# Altium PCB EBC2.PcbDoc (part 2 of 2)
Units mil, origin at the board's own origin, x right, y up, seen from the top; angles counter-clockwise.
Board outline 4019.72 x 2051.49 mil, 2 copper layers (Top Layer, Bottom Layer), stack 12.8 mil thick; 138 components, 112 nets, 469 pads, 88 vias.
Unrouted connection lines stored in the file: 2.
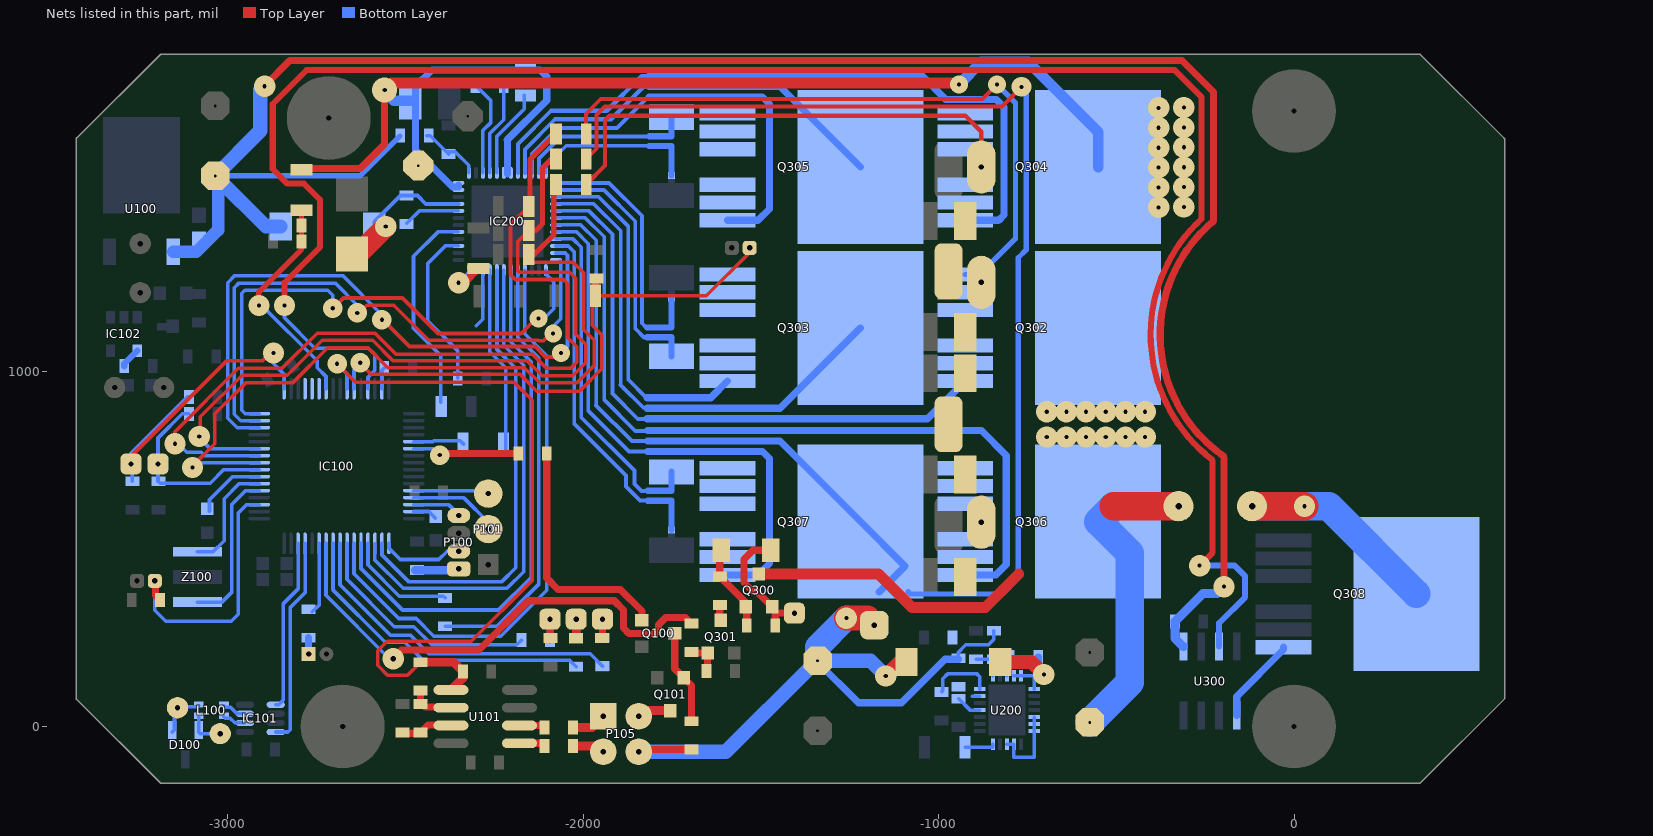
[diagram p2: the nets of this part, all layers, seen from the top]

## Via types
v1: diameter 60, hole 11.81, Top Layer to Bottom Layer, 60 vias
v2: diameter 60, hole 15, Top Layer to Bottom Layer, 13 vias
v3: diameter 55, hole 11.81, Top Layer to Bottom Layer, 8 vias
v4: diameter 50, hole 11.81, Top Layer to Bottom Layer, 6 vias
v5: diameter 70, hole 11.81, Top Layer to Bottom Layer, 1 vias

## Nets (pads, with @x,y where several pads share a name; then routed paths per layer and width w, separated by ;. In a path a pad name is that pad's centre, name@x,y a point inside that pad or via, vN(x,y) a via of type N, cw(c..) or ccw(c..) an arc to the next point about the centre after c; other vN are vias at no path point) (continued)
AN_IN: C122.1 IC100.23 R121.2 R122.1 | length 634.9
  Top Layer w15: v1(-2913,1185) -2913,1223 -2793,1343 C122.1@-2793,1365 R122.1@-2793,1410 R121.2@-2793,1452.83
  Bottom Layer w10: v1(-2913,1185) -2905,1185 -2749,1029 -2749,1010 -2724.13,985.13 IC100.23@-2724.13,950.54
BRK: IC100.29 U300.3 | length 5611.8
  Top Layer w17: v1@-2841,1179 v1(-2841,1185) -2841,1249 -2741,1349 -2741,1483 -2786,1528 -2833,1528 -2874.02,1569.02 -2874.02,1751.97 -2778.48,1847.5 -926.22,1847.5 -925.72,1847 -853.28,1847 -852.78,1847.5 -819.22,1847.5 -818.72,1847 -336,1847 -260,1771 -260,1428.49 ; v1(-265.75,452.76) -229,489.5 -229,748 ; -260.45,1428.49 ccw(c39.37,1102.36) -230.92,751.38
  Bottom Layer w10: v1(-2841,1185) -2841,1150 -2756,1065 -2605,1065 -2587.5,1047.5 -2587.5,1001.5 -2606.02,982.98 IC100.29@-2606.02,950.54
  Bottom Layer w17: v1(-265.75,452.76) -167.32,452.76 -137.8,423.23 -137.8,364.17 -211.22,290.75 U300.3@-211.22,224.95
BTN: C106.1 IC100.3 P103.1 | length 753
  Top Layer w20: P103.1@-3206,410 -3204,408 -3204,369 C106.1@-3191,356
  Bottom Layer w10: P103.1@-3206,410 -3206,327 -3175,296 -2991,296 -2971,316 -2971,601 -2947.25,624.75 IC100.3@-2912.13,624.75
BUCK: C111.1 C113.1 C213.1 L201.2 R204.2 U100.1 U300.1 | length 5899.4
  Top Layer w20: v1(-2897,1802) -2897,1803 -2826,1874 -315,1874 -227,1786 -227,1423 ; -228.86,1420.34 ccw(c39.37,1102.36) -199.24,761.59 ; v1(-196.85,393.7) -196.85,756
  Bottom Layer w15: C213.1@-3036,1549.57 -2628.43,1549.57 R204.2@-2516,1662
  Bottom Layer w25: U300.1@-311.22,224.95 -335.28,249.01 C113.1@-335.28,295.28 -256.54,374.02 -216.54,374.02 v1(-196.85,393.7)
  Bottom Layer w35: U100.1@-3154.24,1335.74 -3089.26,1335.74 -3028,1397 C213.1@-3028,1541.57
  Bottom Layer w40: v1(-2897,1802) -2898,1802 -2909,1791 -2909,1676.57 C213.1@-3036,1549.57 -3028,1541.57 -2893.43,1407 L201.2@-2851.89,1407
CAN_H: D100.1 J100.1 L100.2 | length 137
  Bottom Layer w10: D100.1@-3157.4,-15.66 -3150.59,-8.85 -3150.59,44.41 J100.1@-3142,53 -3139.13,55.87 -3085.31,55.87 L100.2@-3082.43,58.75
CAN_L: D100.2 J101.1 L100.1 | length 105.4
  Bottom Layer w10: L100.1@-3082.43,27.25 -3082.52,27.17 -3082.52,-15.58 -3082.6,-15.66 -3078.26,-20 J101.1@-3022,-20
CAN_RX: IC100.61 IC101.4 | length 585.2
  Bottom Layer w10: IC101.4@-2865.69,-15.39 -2831.39,-15.39 -2825,-9 -2825,335 -2783.19,376.81 IC100.61@-2783.19,515.5
CAN_TX: IC100.62 IC101.1 | length 484.9
  Bottom Layer w10: IC101.1@-2865.69,61.39 -2857.53,61.39 -2845,73.91 -2845,345 -2802.87,387.13 IC100.62@-2802.87,515.5
CUR_GLBL: C119.1 IC100.26 R114.1 U101.5 | length 2091.3
  Top Layer w10: v3(-2693,1021) -2641,969 -2195,969 -2144,918 -2144,411 -2315,240 -2552,240 -2579,213 -2579,172 -2551,144 -2495,144 R114.1@-2458,181
  Top Layer w25: R114.1@-2458,181 -2365,181 C119.1@-2339,155 -2339,136.46 U101.5@-2372.46,103
  Bottom Layer w10: v3@-2684,1021 v3(-2693,1021) -2665.08,993.08 IC100.26@-2665.08,950.54
DM: IC100.44 P101.3 | length 215.1
  Bottom Layer w10: IC100.44@-2477.09,664.12 -2281.03,664.12 P101.3@-2267.59,650.68
DP: IC100.45 P101.2 | length 266.8
  Bottom Layer w10: IC100.45@-2477.09,644.43 -2337.43,644.43 -2266.59,573.59 P101.2@-2266.59,546.68
EN_GATE: IC200.33 R103.1 | length 533.3
  Bottom Layer w10: IC200.33@-2263.14,1284.57 -2263.14,1055.14 -2218,1010 R103.1@-2218,770
FAULT: IC100.54 IC200.28 | length 1680.1
  Bottom Layer w10: IC100.54@-2645.39,515.5 -2645.39,430.39 -2519,304 -2470,304 -2420.5,254.5 -2232.5,254.5 -2103,384 -2103,1043.34 -2164.72,1105.05 IC200.28@-2164.72,1284.57
HALL1: IC100.55 R108.1 | length 674.1
  Bottom Layer w10: IC100.55@-2665.08,515.5 -2665.08,414.08 -2532,281 -2477,281 -2426,230 -2187,230 R108.1@-2174,243
HALL2: IC100.56 R107.1 | length 950.3
  Bottom Layer w10: IC100.56@-2684.76,515.5 -2684.76,398.76 -2543.5,257.5 -2487.5,257.5 -2435,205 -1981,205 R107.1@-1946,170
HALL3: IC100.57 R106.1 | length 905.2
  Bottom Layer w10: IC100.57@-2704.45,515.5 -2704.45,384.45 -2557.12,237.12 -2502.12,237.12 -2451,186 -2038,186 R106.1@-2020,168
LED_1: IC100.59 R105.1 | length 200.8
  Bottom Layer w10: R105.1@-2762.92,322.61 -2743.82,341.72 IC100.59@-2743.82,515.5
NetC103_1: C103.1 IC100.47 | length 68.1
  Bottom Layer w10: IC100.47@-2477.09,605.06 -2434.98,605.06 C103.1@-2416.59,586.68
NetC104_1: C104.1 IC100.31 | length 59.8
  Bottom Layer w10: IC100.31@-2566.65,950.54 -2566.65,1002.35 C104.1@-2561,1008
NetC110_1: C110.1 IC102.4 | length 58.7
  Bottom Layer w18: C110.1@-3292,1014 -3292,1020.84 IC102.4@-3255.31,1057.54
NetC202_1: C202.1 IC200.3 | length 268.8
  Bottom Layer w10: C202.1@-2300,1801 -2260,1761 -2260,1700 -2282.83,1677.17 IC200.3@-2282.83,1558.2
NetC202_2: C202.2 IC200.4 | length 259
  Bottom Layer w10: IC200.4@-2263.14,1558.2 -2263.14,1668.86 -2224,1708 C202.2@-2224,1801
NetC203_2: C203.2 U200.16 | length 72.7
  Bottom Layer w10: C203.2@-943.89,78.37 -911.89,46.37 U200.16@-884.46,46.37
NetC204_1: C204.1 IC200.5 | length 249.9
  Bottom Layer w10: IC200.5@-2243.46,1558.2 -2243.46,1660.54 -2166,1738 C204.1@-2166,1776
NetC205_2: C205.2 IC200.36 | length 120
  Top Layer w20: v1(-2351,1249) -2334.91,1249 C205.2@-2295,1288.91
  Bottom Layer w10: v1(-2351,1249) -2322.2,1277.8 IC200.36@-2322.2,1284.57
NetC206_1: C206.1 U200.22 | length 63.7
  Bottom Layer w10: U200.22@-807.89,142.63 -807.89,195.37 C206.1@-799.89,195.37 C206.1@-796.89,195.37
NetC206_2: C206.2 L200.1 U200.1 U200.23 U200.24 | length 287.2
  Top Layer w40: L200.1@-826.89,181.37 -738.89,181.37 v1(-703.89,146.37)
  Bottom Layer w10: U200.23@-788.2,142.63 U200.24@-768.52,142.63 -731.32,142.63 U200.1@-731.32,105.43
  Bottom Layer w20: C206.2@-719.89,195.37 -719.89,162.37 v1(-703.89,146.37)
NetC207_1: C207.1 R201.1 U200.20 | length 94.4
  Bottom Layer w10: C207.1@-894.89,189.37 -847.26,189.37 U200.20@-847.26,142.63
NetC208_1: C208.1 U200.12 | length 87.3
  Bottom Layer w10: C208.1@-925.8,-58.63 -847.26,-58.63 U200.12@-847.26,-49.89
NetC210_1: C210.1 IC200.44 | length 159.7
  Bottom Layer w10: C210.1@-2496.95,1416.05 -2462.09,1450.91 IC200.44@-2351.72,1450.91
NetC210_2: C210.2 D200.2 IC200.45 L201.1 | length 429.5
  Top Layer w60: D200.2@-2662,1327 -2636,1327 v1(-2556,1407)
  Bottom Layer w11: L201.1@-2588.11,1407 -2588.11,1420.89 -2514.9,1494.1 C210.2@-2497,1494.1 -2467.1,1494.1 -2443.6,1470.6 IC200.45@-2351.72,1470.6
NetC212_1: C212.1 J200.1 L200.2 P105.4 R123.1 R201.2 R202.2 | length 1940.4
  Top Layer w20: P105.4@-1844,-71 -1838,-65 R123.1@-1696,-65
  Top Layer w40: v1(-1148.89,142) -1109.52,181.37 L200.2@-1090.67,181.37
  Top Layer w70: v1(-1259.84,305.12) -1200.79,305.12 J200.1@-1181.1,285.43
  Bottom Layer w10: C212.1@-1355.89,169.85 C212.1@-1340.89,184.85 ; R202.2@-944.89,189.37 -944.89,208.48 -923.37,230 -859.89,230 -844.89,245 R201.2@-844.89,269.37
  Bottom Layer w20: C212.1@-1340.89,184.85 -1340.89,181.89 -1226,67 -1104.26,67 -981.89,189.37 R202.2@-944.89,189.37
  Bottom Layer w40: P105.4@-1844,-71 -1599,-71 -1358.15,169.85 C212.1@-1355.89,169.85 ; C212.1@-1340.89,184.85 -1191.74,184.85 v1(-1148.89,142)
  Bottom Layer w70: C212.1@-1340.89,184.85 -1340.89,224.07 v1(-1259.84,305.12)
NetD300_1: D300.1 Q300.1 R308.1 R310.2 | length 244.2
  Top Layer w20: D300.1@-1611.88,496 -1616,491.88 R310.2@-1616,422 -1540,346 R308.1@-1540,285
NetD300_2: D300.2 J300.1 Q300.2 R308.2 | length 357.1
  Top Layer w20: Q300.2@-1468.6,336.74 -1513.86,382 -1525,382 -1548,405 -1548,471 -1523,496 D300.2@-1472.12,496 D300.2@-1468.6,492.48 ; R308.2@-1460,285 -1460,322 -1457,319 J300.1@-1406,319
NetIC100_5: IC100.5 Z100.1 | length 448.6
  Bottom Layer w10: Z100.1@-3086,350.27 -3016.73,350.27 -2990,377 -2990,624 -2949.88,664.12 IC100.5@-2912.13,664.12
NetIC100_6: IC100.6 Z100.3 | length 322.4
  Bottom Layer w10: Z100.3@-3086,492 -3042,492 -3011,523 -3011,641 -2968.2,683.8 IC100.6@-2912.13,683.8
NetIC100_9: IC100.9 R302.1 R303.1 | length 2239.8
  Top Layer w10: v1(-3100,729) -3100,733 -3037,796 -3037,880 -2949,968 -2817,968 -2719,1066 -2606,1066 -2550,1010 -2166,1010 -2123,967 -2018,967 -1969,1016 -1969,1087 -1999,1117 -1999,1277 -2029,1307 -2147,1307 R303.1@-2154,1314
  Top Layer w15: R303.1@-2154,1314 R303.1@-2154,1328 ; R303.1@-2139,1328 -2083,1384 R302.1@-2083,1508
  Bottom Layer w10: v1(-3100,729) -3100,732 -3089.14,742.86 IC100.9@-2912.13,742.86
NetIC100_10: IC100.10 R300.1 R301.1 | length 2430.5
  Top Layer w10: v1(-3149.27,795.79) -3149.27,829.73 -2971,1008 -2848,1008 -2749,1107 -2586.28,1107 -2527.28,1048 -2143,1048 -2102.76,1007.76 -2036.24,1007.76 -2019,1025 -2019,1069 -2044,1094 -2044,1246 -2056,1258 -2192,1258 -2205,1271 -2205,1413 R301.1@-2154,1464
  Top Layer w15: R301.1@-2154,1464 -2150,1468 -2150,1596 R300.1@-2078,1668
  Bottom Layer w10: v1(-3149.27,795.79) -3139.79,795.79 -3116,772 -3075,772 -3065.54,762.54 IC100.10@-2912.13,762.54
NetIC100_11: IC100.11 R304.1 R305.1 | length 2280.9
  Top Layer w10: v1@-3081.73,809.35 -3081.38,809 -3077.69,812.69 -3077.69,871.31 -2960,989 -2833,989 -2735,1087 -2593,1087 -2536,1030 -2159,1030 -2116,987 -2030,987 -1993,1024 -1993,1076 -2021,1104 -2021,1261 -2038,1278 -2180,1278 -2184,1282 -2184,1366 R305.1@-2154,1396
  Top Layer w15: R305.1@-2154,1396 -2134,1396 -2115,1415 -2115,1572 -2090,1597 R304.1@-2077,1597
  Bottom Layer w10: v1(-3081,816) -3081.5,816 -3083,814.5 -3050.72,782.23 IC100.11@-2912.13,782.23
NetIC100_14: IC100.14 IC200.23 | length 1850.2
  Top Layer w11: v3@-2567,1147 -2489,1069 -2135,1069 -2106,1040 -2074,1040 v4(-2063,1051) v4@-2062,1052
  Bottom Layer w10: IC100.14@-2912.13,841.28 -2974.28,841.28 -3001,868 -3001,1249 -2982,1268 -2676,1268 v3@-2567,1159 ; IC200.23@-2077.12,1332.8 -2076.92,1332.61 -2051.61,1332.61 -2045,1326
  Bottom Layer w11: v3@-2567,1147 v3@-2567,1159 ; v4@-2062,1052 -2045,1069 -2045,1326
  other v3: -2567,1145
NetIC100_15: IC100.15 IC200.24 | length 1645.2
  Top Layer w10: v3(-2636,1164) -2632,1164 -2610,1186 -2534,1186 -2435.5,1087.5 -2127.34,1087.5 -2125.84,1086 -2112,1086 v4@-2102,1096
  Bottom Layer w10: IC100.15@-2912.13,860.97 -2963.97,860.97 -2982,879 -2982,1235 -2969,1248 -2698,1248 -2636,1186 v3(-2636,1164) ; v4@-2099,1099 v4@-2082,1099 ; v4@-2094.5,1116.5 -2063.5,1147.5 -2063.5,1308.5 IC200.24@-2065.12,1310.12
  other v4: -2085,1106
NetIC100_16: IC100.16 IC200.25 | length 1510.8
  Top Layer w10: v3(-2705,1177) -2704,1177 -2675,1206 -2509,1206 -2409,1106 -2175,1106 v4@-2131,1150
  Bottom Layer w10: IC100.16@-2912.13,880.65 -2951.65,880.65 -2961,890 -2961,1219 -2952,1228 -2719,1228 -2705,1214 v3(-2705,1177) ; v4@-2131,1150 -2119,1150 -2114,1145 -2083,1176 -2083,1251 -2105.66,1273.66 IC200.25@-2105.66,1284.57
  other v4: -2126,1148
NetIC100_37: IC100.37 R103.2 | length 145
  Bottom Layer w10: IC100.37@-2477.09,801.91 -2423.36,801.91 -2420.78,804.5 -2346.59,804.5 R103.2@-2337.09,795
NetIC101_6: IC101.6 L100.4 | length 66.3
  Bottom Layer w10: L100.4@-3011.57,27.25 -3007.71,23.39 -2994.39,23.39 -2981.21,10.21 IC101.6@-2952.31,10.21
NetIC101_7: IC101.7 L100.3 | length 68.8
  Bottom Layer w10: L100.3@-3011.57,58.75 -3007.71,54.89 -2993.89,54.89 -2974.8,35.8 IC101.7@-2952.31,35.8
NetIC200_1: IC200.1 R204.1 R205.2 | length 183.4
  Bottom Layer w10: R204.1@-2440,1663 R204.1@-2435,1663 -2431,1663 R205.2@-2386,1618 ; R205.2@-2379,1611 R205.2@-2386,1618 ; IC200.1@-2322.2,1558.2 -2322.2,1579.2 -2361,1618 R205.2@-2386,1618
NetIC200_12: IC200.12 NT300.1 | length 480.4
  Bottom Layer w10: IC200.12@-2105.66,1558.2 -2105.66,1576.34 -2048,1634 -1813,1634
  Bottom Layer w18: -1814.96,1633.86 -1751.97,1633.86 NT300.1@-1751.97,1551.18
NetIC200_13: IC200.13 NT301.1 | length 752.5
  Bottom Layer w10: IC200.13@-2077.12,1529.65 -1927.65,1529.65 -1835,1437 -1835,1135
  Bottom Layer w11: -1835,1135 -1822,1122
  Bottom Layer w18: -1820.87,1122.99 -1751.97,1122.99 NT301.1@-1751.97,1205.67
NetIC200_22: IC200.22 NT302.1 | length 1005.2
  Bottom Layer w10: IC200.22@-2077.12,1352.49 -2076.92,1352.29 -2042.29,1352.29 -2025,1335 -2025,851
  Bottom Layer w11: -2025,851 -1880,706 -1880,675 -1841,636 -1820,636
  Bottom Layer w18: -1818.9,635.83 -1751.97,635.83 NT302.1@-1751.97,553.15
NetIC200_29: IC200.29 R104.1 | length 1221.5
  Bottom Layer w10: R104.1@-2389,282 -2244,282 -2125,401 -2125,1036 -2184.4,1095.4 IC200.29@-2184.4,1284.57
NetIC200_34: IC200.34 | length 164.1
  Bottom Layer w10: -2301,1128 -2282.83,1146.17 IC200.34@-2282.83,1284.57
NetIC200_39: IC200.39 R100.1 | length 464.6
  Bottom Layer w10: R100.1@-2354,980 -2354,1058 -2438,1142 -2438,1303 -2388.51,1352.49 IC200.39@-2351.72,1352.49
NetIC200_41: IC200.41 R101.1 | length 596.7
  Bottom Layer w10: R101.1@-2401,913 -2401,1044 -2478,1121 -2478,1323 -2409.14,1391.86 IC200.41@-2351.72,1391.86
NetJ102_1: J102.1 R106.2 R109.1 | length 107
  Top Layer w25: R109.1@-2020,249 J102.1@-2020,302
  Bottom Layer w25: R106.2@-2020,248 J102.1@-2020,302
NetJ103_1: J103.1 R107.2 R110.1 | length 105.4
  Top Layer w20: R110.1@-1947,249 -1946,250 J103.1@-1946,302
  Bottom Layer w20: R107.2@-1946,250 J103.1@-1946,302
NetJ104_1: J104.1 R108.2 R111.1 | length 112.4
  Top Layer w20: J104.1@-2094,302 -2094,250 R111.1@-2093,249
  Bottom Layer w20: R108.2@-2094,243 J104.1@-2094,302
NetJ305_1: J305.1 Q308.7 | length 712.5
  Top Layer w80: J305.1@-118.11,620.08 v1(29.53,620.08)
  Bottom Layer w80: J305.1@-118.11,620.08 v1(29.53,620.08) 97.64,620.08 Q308.7@344.49,373.23
NETLABEL23: IC100.20
NETLABEL24: IC100.21
NETLABEL25: IC100.22
NetP100_1: P100.1 R102.1 | length 123.7
  Bottom Layer w25: R102.1@-2472.59,439.68 -2354.59,439.68 P100.1@-2350.59,443.68
NetP102_1: P102.1 R105.2 | length 46.4
  Bottom Layer w20: R105.2@-2774,250 -2774,205 P102.1@-2773,204
NetP105_1: P105.1 R119.1 | length 98.3
  Top Layer w25: R119.1@-2029,-3 -1976,-3 P105.1@-1944,29
NetP105_2: P105.2 Q101.3 | length 95.5
  Top Layer w10: P105.2@-1844,29 P105.2@-1828.26,44.74
  Top Layer w25: P105.2@-1828.26,44.74 Q101.3@-1755,44.74
NetP105_3: P105.3 R118.1 | length 91.6
  Top Layer w25: R118.1@-2029,-55 -1960,-55 P105.3@-1944,-71
NetQ100_1: Q100.1 R120.2 | length 682
  Top Layer w20: R120.2@-2103,768 -2103,418 -2071,386 -1896,386 -1835.26,325.26 Q100.1@-1835.26,299.4
NetQ100_3: Q100.3 Q101.1 R123.2 | length 266.4
  Top Layer w20: Q100.3@-1742.74,262 -1742.74,162.4 Q101.1@-1717.6,137.26 -1696,115.66 R123.2@-1696,15
NetQ301_1: Q301.1 R306.1 R307.1 | length 98.8
  Top Layer w20: R306.1@-1696,210 -1692.74,206.74 Q301.1@-1650.4,206.74 -1650.4,158.6 R307.1@-1653,156
NetQ301_3: Q301.3 R310.1 | length 44
  Top Layer w20: R310.1@-1616,342 -1616,302.26 Q301.3@-1613,299.26
NetQ308_1: Q308.1 U300.5 | length 246.8
  Bottom Layer w20: U300.5@-161.22,30.95 -161.22,84.84 -29.53,216.54 Q308.1@-29.53,223.23
NetR113_1: R113.1 R115.1 U101.7 | length 150.7
  Top Layer w20: R115.1@-2512,-19 -2458,-19 R113.1@-2458,-17 -2437,4 -2410.94,4 -2409.94,3 U101.7@-2372.46,3
NetR113_2: R113.2 R114.2 U101.6 | length 127.7
  Top Layer w20: R114.2@-2458,101 R113.2@-2458,63 -2452.09,63 -2443.54,54.45 -2373.9,54.45 U101.6@-2372.46,53
NetR118_2: R118.2 U101.1 | length 73.9
  Top Layer w20: U101.1@-2179.54,-47 -2117,-47 R118.2@-2109,-55
NetR119_2: R119.2 U101.2 | length 73
  Top Layer w20: U101.2@-2179.54,3 -2115,3 R119.2@-2109,-3
NetR200_1: R200.1 U200.19 | length 186.3
  Bottom Layer w10: R200.1@-991.89,97.37 -989,100.26 -989,134 -975,148 -892,148 -884.46,140.46 U200.19@-884.46,105.43
NetR202_1: R202.1 R203.2 U200.18 | length 21.5
  Bottom Layer w10: -905.94,85.74 U200.18@-884.46,85.74
PHASE_1: IC200.16 J301.1 Q302.2 Q302.3 Q302.4 Q302.5 Q302.6 Q303.7 R300.2 | length 3328
  Top Layer w11: R300.2@-1993,1668 -1993,1724 -1951,1766 -877,1766 v4(-836,1807)
  Bottom Layer w10: IC200.16@-2077.12,1470.6 -1970.6,1470.6 -1895,1395 -1895,961
  Bottom Layer w11: -1895,961 -1831,897 -1821,897
  Bottom Layer w15: Q302.6@-925.2,1272.05 -884.95,1272.05 -784,1373 -784,1755 v4(-836,1807)
  Bottom Layer w20: -1820.87,895.67 -1446.85,895.67 Q303.7@-1220.47,1122.05
PHASE_2: IC200.9 J302.1 Q304.2 Q304.3 Q304.4 Q304.5 Q304.6 Q305.7 R302.2 | length 2560.8
  Top Layer w12: R302.2@-1992,1526 -1939,1579 -1939,1706 -1926,1719 -925,1719 -880,1674 J302.1@-880,1574.8
  Bottom Layer w11: IC200.9@-2164.72,1558.2 -2164.72,1624.28 -2080,1709
  Bottom Layer w12: -2080,1709 -1922,1709 -1829,1802 -1816,1802
  Bottom Layer w20: -1814.96,1801.18 -1446.85,1801.18 Q305.7@-1220.47,1574.8
PHASE_3: IC200.19 J303.1 Q306.2 Q306.3 Q306.4 Q306.5 Q306.6 Q307.7 R304.2 | length 4845.5
  Top Layer w11: R304.2@-1992,1597 -1963,1626 -1963,1721 -1939.38,1744.62 -822.38,1744.62 v3(-767,1800)
  Bottom Layer w10: IC200.19@-2077.12,1411.54 -2007.09,1411.54 -1964,1368.46 -1964,904
  Bottom Layer w11: -1964,904 -1863,803 -1820,803
  Bottom Layer w15: Q307.7@-1086,379 -1080,373 -821,373 -776,418 -776,1319.12 -754,1341.12 -754,1787 v3(-767,1800)
  Bottom Layer w20: -1818.9,803.15 -1446.85,803.15 Q307.7@-1220.47,576.77 -1095,451.3 Q307.7@-1167.3,379
PWM_LIGHT: IC100.38 R120.1 | length 303.3
  Top Layer w20: v3(-2404,764) -2400,768 R120.1@-2183,768
  Bottom Layer w10: IC100.38@-2477.09,782.23 -2422.23,782.23 v3(-2404,764)
PWR_EN: IC100.58 R306.2 | length 1418.8
  Top Layer w20: v2(-2535,191) -2511,215 -2294,215 -2155,354 -1913,354 -1887,328 -1887,277 -1872,262 -1797,262 -1788,271 -1788,287 -1768,307 -1713,307 R306.2@-1696,290
  Bottom Layer w10: IC100.58@-2724.13,515.5 -2724.13,369.13 -2546,191 v2(-2535,191)
RESET: C101.1 IC100.7 | length 198.4
  Bottom Layer w10: C101.1@-3052,606.61 -3052,638 -2986.51,703.49 IC100.7@-2912.13,703.49
S\P\I\_\C\S\: IC100.50 IC200.32 | length 1316.3
  Bottom Layer w10: IC100.50@-2566.65,515.5 -2566.65,482.65 -2492,408 -2229,408 -2190,447 -2190,1008 -2243,1061 -2243,1284.12 IC200.32@-2243.46,1284.57
SPI_MISO: IC100.52 R104.2 | length 316
  Bottom Layer w10: IC100.52@-2606.02,515.5 -2606.02,455.02 -2518,367 -2394,367 R104.2@-2389,362
SPI_MOSI: IC100.53 IC200.30 | length 1524.2
  Bottom Layer w10: IC100.53@-2625.71,515.5 -2625.71,444.71 -2509,328 -2239,328 -2147,420 -2147,1026 -2204.09,1083.09 IC200.30@-2204.09,1284.57
SPI_SCK: IC100.51 IC200.31 | length 1388.8
  Bottom Layer w10: IC100.51@-2586.59,514.68 -2586.59,468.59 -2507,389 -2215,389 -2168,436 -2168,1017 -2223.77,1072.77 IC200.31@-2223.77,1284.57
SWCLK: IC100.49 P100.2 | length 233
  Bottom Layer w10: IC100.49@-2546.97,515.5 -2546.97,501.97 -2515,470 -2407,470 -2383.32,493.68 P100.2@-2350.59,493.68
SWDIO: IC100.46 P100.4 | length 138.5
  Bottom Layer w10: IC100.46@-2477.09,624.75 -2379.66,624.75 P100.4@-2350.59,595.68
TEMP_EATER: C121.1 IC100.17 J106.1 R117.2 | length 971.1
  Top Layer w10: J106.1@-3273,739 -3273,760 -3003,1030 -2902,1030 -2881,1051 v1(-2872,1051)
  Bottom Layer w10: J106.1@-3273,739 -3273,769 -3114,928 R117.2@-3110,928 ; C121.1@-3269,690 J106.1@-3269,739 ; v1(-2872,1051) -2872,1040 -2881.5,1030.5 -2842.24,991.24 IC100.17@-2842.24,950.54
TEMP_FET: C115.1 IC100.27 P104.1 R112.2 | length 1583.7
  Top Layer w10: v3@-2627,1021 -2598,992 -2179,992 -2131,944 -2011,944 -1948,1007 -1948,1102 -1975,1129 -1975,1202.91 R112.2@-1965.91,1212 -1654,1212 -1532,1334 P104.1@-1532,1347 ; C115.1@-1967,1261 C115.1@-1965.91,1259.91
  Top Layer w20: R112.2@-1965.91,1212 C115.1@-1965.91,1259.91
  Bottom Layer w10: IC100.27@-2645.39,950.54 -2645.39,1002.61 -2627,1021 v3@-2625.71,1019.71
  other v3: -2628,1024
TEMP_WHEEL: C120.1 IC100.8 J105.1 R116.2 | length 539.3
  Bottom Layer w10: R116.2@-3110,880 -3129,880 -3197,812 J105.1@-3197,739 -3197,691 C120.1@-3196,690 -3191,685 -3050,685 -3011.83,723.17 IC100.8@-2912.13,723.17
UH_P: IC200.17 Q302.1 | length 1696.4
  Bottom Layer w10: IC200.17@-2077.12,1450.91 -1983.91,1450.91 -1918,1385 -1918,937
  Bottom Layer w11: -1918,937 -1847,866 -1825,866
  Bottom Layer w20: -1820.87,866.14 -1031.1,866.14 Q302.1@-925.2,972.05
UL_N: IC200.14 Q303.2 Q303.3 Q303.4 Q303.5 Q303.6 R309.2 | length 726
  Bottom Layer w10: IC200.14@-2077.12,1509.97 -1941.97,1509.97 -1854,1422 -1854,1120
  Bottom Layer w11: -1854,1120 -1829,1095 -1822,1095
  Bottom Layer w18: -1820.87,1095.43 -1751.97,1095.43 R309.2@-1751.97,1042.28
UL_P: IC200.15 Q303.1 | length 987.5
  Bottom Layer w10: IC200.15@-2077.12,1490.28 -1956.28,1490.28 -1873,1407 -1873,976
  Bottom Layer w11: -1873,976 -1822,925
  Bottom Layer w20: -1820.87,925.2 -1641.34,925.2 Q303.1@-1594.49,972.05
VH_P: IC200.8 Q304.1 | length 1982.9
  Bottom Layer w11: IC200.8@-2184.4,1558.2 -2184.4,1639.6 -2091,1733
  Bottom Layer w12: -2091,1733 -1934,1733 -1836,1831 -1816,1831
  Bottom Layer w20: -1814.96,1830.71 -1045.71,1830.71 -980,1765 -838,1765 -816,1743 -816,1440 -831.2,1424.8 Q304.1@-925.2,1424.8
VIN: C201.1 C204.2 C209.1 C211.2 C300.1 C301.2 C302.1 C303.1 C304.1 C305.1 C306.1 IC200.6 IC200.7 IC200.47 IC200.48 J304.1 Q300.3 Q302.7 Q304.7 Q306.7 R121.1 U200.5 U200.6 U200.7 U200.9 U200.10 | length 5719.8
  Top Layer w20: R121.1@-2793,1567 -2790,1570 -2628,1570 -2559.05,1638.95 v5(-2559.05,1791.34)
  Top Layer w30: v5(-2559.05,1791.34) -2539.36,1811.02 v4@-943,1811.02 ; Q300.3@-1506,429.26 -1169.26,429.26 -1075,335 -869.26,335 -775,429.26
  Top Layer w80: -507.87,620.08 J304.1@-324.8,620.08
  Bottom Layer w10: U200.10@-807.89,-49.89 U200.9@-788.2,-49.89 -788.2,-86.63 -731.32,-86.63 U200.7@-731.32,-12.69 U200.6@-731.32,7 U200.5@-731.32,26.69
  Bottom Layer w20: IC200.48@-2351.72,1524.39 -2351.72,1518.18 -2368.18,1518.18 -2472,1622 -2472,1802 -2426,1848 -2122,1848 -2103,1829 -2103,1762 -2213.93,1651.07 ; -2214,1651 -2213.93,1651.07 ; -2213.93,1554.39 -2213.93,1651.07
  Bottom Layer w30: v5(-2559.05,1791.34) -2559.05,1787.05 -2533,1761 C209.1@-2487.12,1761 ; v4(-943,1807) -879.92,1870.08 -748.03,1870.08 -551.18,1673.23 Q304.7@-551.18,1574.8
  Bottom Layer w80: C211.2@-574.89,11.57 -462.6,123.87 -462.6,488.19 Q306.7@-551.18,576.77 Q306.7@-507.87,620.08
  other v1: -696,815 -640.6,815 -585.2,815 -529.8,815 -474.4,815 -419,815 -696,886 -640.6,886 -585.2,886 -529.8,886 -474.4,886 -419,886 -381,1461 -310,1462 -381,1517 -310,1518 -381,1573 -310,1574 -381,1629 -310,1630 -381,1685 -310,1686 -381,1741 -310,1742
VL_N: IC200.11 Q305.2 Q305.3 Q305.4 Q305.5 Q305.6 R311.2 | length 492.8
  Bottom Layer w11: IC200.11@-2125.35,1558.2 -2125.35,1598.65 -2063,1661 -1815,1661
  Bottom Layer w18: -1814.96,1661.42 -1751.97,1661.42 R311.2@-1751.97,1714.57
VL_P: IC200.10 Q305.1 | length 1223.7
  Bottom Layer w11: IC200.10@-2145.03,1558.2 -2145.03,1610.97 -2072,1684 -1905,1684 -1815,1774
  Bottom Layer w20: -1814.96,1771.65 -1496.06,1771.65 -1476.38,1751.97 -1476.38,1456.69 -1508.27,1424.8 Q305.1@-1594.49,1424.8
WH_P: IC200.18 Q306.1 | length 2248.3
  Bottom Layer w10: IC200.18@-2077.12,1431.23 -1994.23,1431.23 -1941,1378 -1941,919
  Bottom Layer w11: -1941,919 -1854,832 -1818,832
  Bottom Layer w20: -1818.9,832.68 -879.68,832.68 -810,763 -810,456 -839.23,426.77 Q306.1@-925.2,426.77
WL_N: IC200.21 Q307.2 Q307.3 Q307.4 Q307.5 Q307.6 R312.2 | length 971.2
  Bottom Layer w10: IC200.21@-2077.12,1372.17 -2029.17,1372.17 -2006,1349 -2006,870
  Bottom Layer w11: -2006,870 -1856,720 -1856,683 -1836,663 -1822,663
  Bottom Layer w18: -1818.9,663.39 -1751.97,663.39 R312.2@-1751.97,716.53
WL_P: IC200.20 Q307.1 | length 1567.2
  Bottom Layer w10: IC200.20@-2077.12,1391.86 -2018.86,1391.86 -1986,1359 -1986,888
  Bottom Layer w11: -1986,888 -1872,774 -1819,774
  Bottom Layer w20: -1818.9,773.62 -1673.23,773.62 -1496.06,773.62 -1476.38,753.94 -1476.38,458.66 -1508.27,426.77 Q307.1@-1594.49,426.77
pads on no net: IC100.2 IC100.4 IC100.24 IC100.25 IC100.28 IC100.30 IC100.33 IC100.39 IC100.40 IC101.5 IC101.8 U200.4 U200.8 U200.13 U200.14 U200.15 U200.17 U300.6 U300.7 U300.8

## Polygon pours and split planes (outlines as drawn)
NetIC200_34 on Bottom Layer "HZ" (solid, pour order 14): -2330,1140 -2330,1110 -2280,1060 -2275,1060 -2275,1150 -2310,1150 -2315,1145 -2325,1145
_CTRL_GND on Bottom Layer "G_B" (solid, remove dead copper, pour order 12): -3425.43,76.17 -3190.86,-158.4 ccw(c-3189.46,-157) -3190.65,-158.59 ccw(c-3189,-157.48) -3189,-159.46 354,-159.46 ccw(c354,-157.48) 355.48,-158.81 ccw(c354.91,-156.91) 356.31,-158.31 591.95,77.34 ccw(c590.55,78.74) 592.53,78.74 ccw(c590.55,78.74) 592.53,78.81 ccw(c590.55,78.89) 592.53,78.89 592.53,1654.14 ccw(c590.55,1654.14) 590.79,1656.11 355.45,1891.45 ccw(c354.05,1890.05) 353.03,1891.75 -3189,1891.75 ccw(c-3189,1889.76) -3190.62,1890.91 ccw(c-3189.37,1889.37) -3190.77,1890.77 -3424.53,1657.01 ccw(c-3425.2,1655.14) -3427.18,1655.14 -3427.18,78.14 ccw(c-3425.2,78.14)
WL_N on Bottom Layer "Top Layer-No Net" (solid, pour order 4): -1820.87,757.87 -1820.87,679.13 -1732.28,679.13 -1732.28,541.34 -1683.07,541.34 -1683.07,462.6 -1505.91,462.6 -1496.06,472.44 -1496.06,757.87
PHASE_2 on Bottom Layer "Top Layer-No Net" (solid, pour order 8): -1397.64,1791.34 -1397.64,1358.27 -767.72,1358.27 -767.72,1791.34
UL_N on Bottom Layer "Top Layer-No Net" (solid, pour order 5): -1825.46,1000.29 -1825.46,1079.03 -1736.88,1079.03 -1736.88,1216.82 -1687.67,1216.82 -1687.67,1295.56 -1510.5,1295.56 -1500.66,1285.72 -1500.66,1000.29
VL_N on Bottom Layer "Top Layer-No Net" (solid, pour order 6): -1820.87,1761.81 -1820.87,1683.07 -1732.28,1683.07 -1732.28,1545.28 -1683.07,1545.28 -1683.07,1466.54 -1505.91,1466.54 -1496.06,1476.38 -1496.06,1761.81
PHASE_3 on Bottom Layer "Top Layer-No Net" (solid, pour order 9): -1397.64,787.4 -1397.64,354.33 -767.72,354.33 -767.72,787.4
VIN on Bottom Layer "Top Layer-No Net" (solid, pour order 10): -521.65,196.85 -688.98,29.53 -748.03,29.53 -748.03,-29.53 -757.87,-39.37 -787.4,-39.37 -787.4,-85.83 -791.29,-89.71 -782.57,-98.43 -570.87,-98.43 -403.54,68.9 -403.54,423.23 -423.23,442.91 -442.91,423.23 -521.65,423.23
VIN on Bottom Layer "VIN_B" (solid, pour order 3): -728.35,1791.34 -728.35,354.33 -708.66,334.65 -329.07,334.65 -255.91,407.81 -255.91,1732.28 -314.96,1791.34
PHASE_1 on Bottom Layer "Top Layer-No Net" (solid, pour order 7): -1397.64,1338.58 -1397.64,905.51 -767.72,905.51 -767.72,1338.58
_CTRL_GND on Top Layer "G_T" (solid, remove dead copper, pour order 11): -3425.43,76.17 -3190.86,-158.4 ccw(c-3189.46,-157) -3190.65,-158.59 ccw(c-3189,-157.48) -3189,-159.46 354,-159.46 ccw(c354,-157.48) 355.48,-158.81 ccw(c354.91,-156.91) 356.31,-158.31 591.95,77.34 ccw(c590.55,78.74) 592.53,78.74 ccw(c590.55,78.74) 592.53,78.81 ccw(c590.55,78.89) 592.53,78.89 592.53,1654.14 ccw(c590.55,1654.14) 590.79,1656.11 355.45,1891.45 ccw(c354.05,1890.05) 353.03,1891.75 -3189,1891.75 ccw(c-3189,1889.76) -3190.62,1890.91 ccw(c-3189.37,1889.37) -3190.77,1890.77 -3424.53,1657.01 ccw(c-3425.2,1655.14) -3427.18,1655.14 -3427.18,78.14 ccw(c-3425.2,78.14)
VIN on Top Layer "VIN_T" (solid, pour order 2): -275.59,1811.02 -905.51,1811.02 -905.51,1623.26 -905.51,1544.49 -1003.83,1446.17 -1003.83,1180.99 -980,1157.16 -980,947.93 -1023.62,904.3 -1023.62,787.4 -955,718.78 -955,334.65 -343.01,334.65 -255.95,421.7 -255.95,1791.38 -275.59,1811.02 -276.69,1809.92 -326.32,1809.92

## Other copper
Top Layer:
  pour cut-out: -982,1848 -982,1785 -965,1768 -832,1768 -832,1832 -849,1849
Bottom Layer:
  pour cut-out: -1555.12,1397.64 -1555.12,1299.21 -1551.47,1295.56 -1510.5,1295.56 -1510.5,1392.39 -1515.75,1397.64
  pour cut-out: -1535.43,413.39 -1377.95,255.91 -1299.21,255.91 -1299.21,354.33 -1304.4,359.52 -1397.64,359.52 -1397.64,374.02 -1437.01,413.39
  pour cut-out: -760,377 -760,359 -773,346 -721,346 -738,363 -738,377
Multi-Layer:
  pour cut-out: -355.97,1103.77 ccw(c37.73,1103.77) 37.73,710.07 ccw(c37.73,1103.77) 431.43,1103.77 ccw(c37.73,1103.77) 37.73,1497.47 ccw(c37.73,1103.77)

## Silkscreen, mask and mechanical layers (free items; w line width, h text height)
Top Overlay:
  circle w10: c39.37,1102.36 r393.7
  lines w3.94: -3425.2,78.14 -3425.2,1655.14 ; -3425.2,78.74 -3189.46,-157 ; -3425.2,866.04 905.51,866.04 ; -3425.2,1653.54 -3189.37,1889.37 ; -3189,-157.48 354,-157.48 ; -3189,1889.76 354,1889.76 ; 354.05,1890.05 590.55,1653.54 ; 354.91,-156.91 590.55,78.74 ; 590.55,78.89 590.55,1654.14

## Text inside footprints (layer, text, board x,y; h text height)
P105: Top Overlay "3" at -1964,-131 h50 r270; Top Overlay "4" at -1864,-131 h50 r270; Top Overlay "2" at -1864,129 h50 r270; Top Overlay "1" at -1964,109 h50 r270